# EAGLE board Generic_Business_Card (EAGLE 6.6.0)
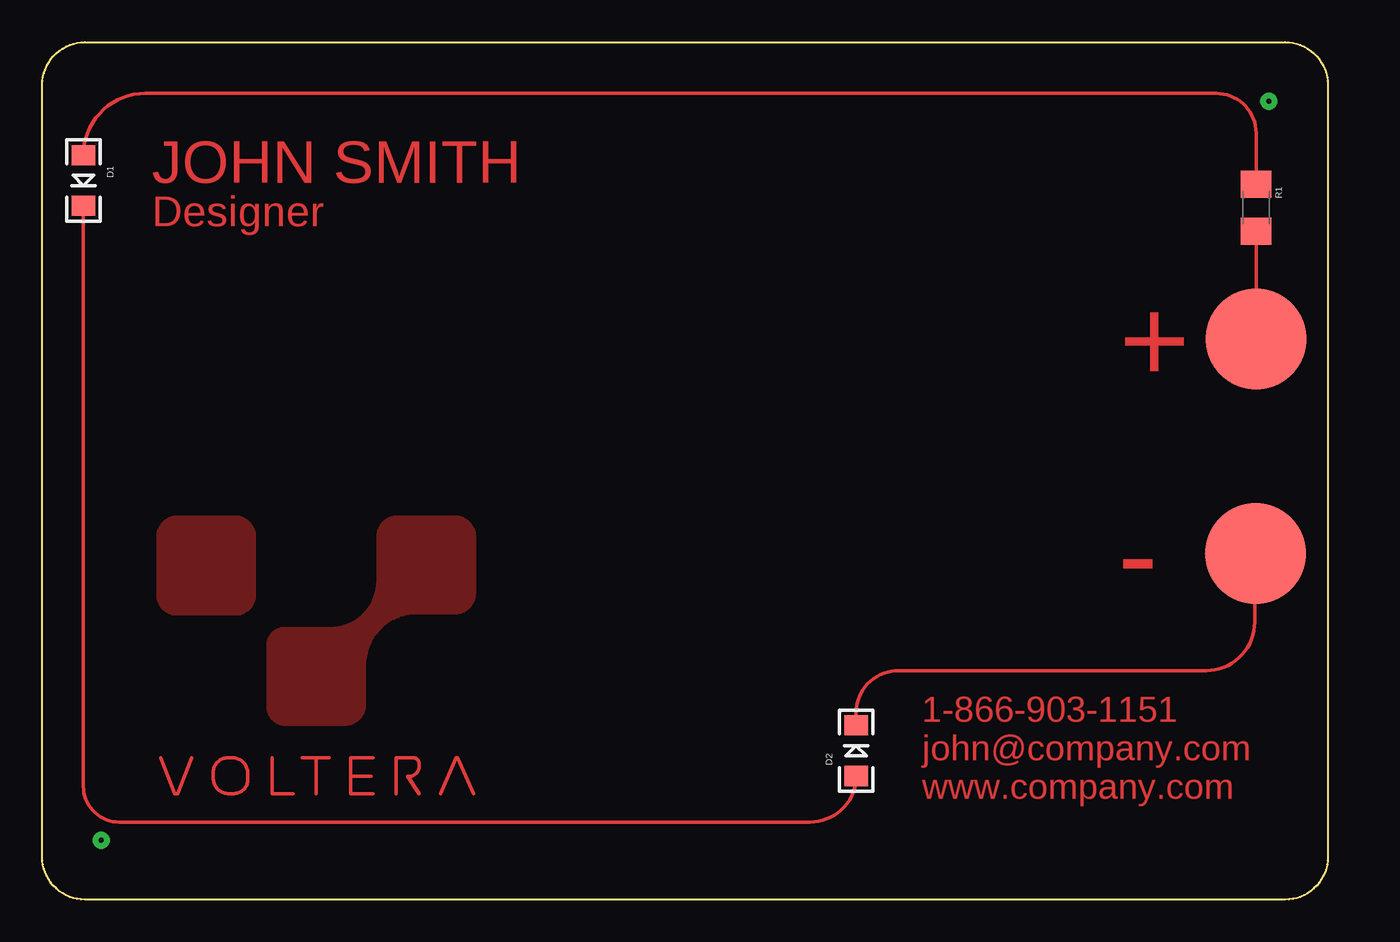
[diagram p0: board, top side]

Size 76.2 x 50.8 mm. Coordinates in mm from the lower left corner, seen from the top.
Copper layers (1*16): Top 0.035mm / dielectric 1.5mm / Bottom 0.035mm
Design rules "default": minimum track width 10mil, minimum drill 24mil, track to track 8mil, track to pad 8mil, pad to pad 8mil, via to via 8mil, smd to smd 8mil, copper to edge 40mil, drill to drill 8mil, minimum pad ring 10mil, minimum via ring 8mil, stop-mask expansion 4mil, vias tented up to drill 0mil, thermal gap 10mil

## Footprints (pad centres in the part's own frame; a part is rotated, then mirrored left to right if it is on the bottom)
LED-1206 = smd 1.2 x 1.4: A -1.5,0; C 1.5,0
1206 = smd 1.6 x 1.8: 1 -1.4,0; 2 1.4,0
2X3_BOARD = drill 0.3 pad 1: P$1 -33.4,-21.49; P$2 35.8,22.3
SMD_BATTERY_PADS = smd 6 x 6: NEG 6.35,-0.04; POS -6.35,0

## Placement (x,y rotation side)
D1  WHITE  [LED-1206]  2.44,42.61 270 top
D2  WHITE  [LED-1206]  48.24,8.83 90 top
R1  [1206]  71.94,41 270 top
U$1  2X3_BOARD  [2X3_BOARD]  36.9,25 0 top
U$8  SMD_BATTERY_9V  [SMD_BATTERY_PADS]  71.94,26.86 270 top

## Library data of the parts
D1 D2 = SparkFun-LED; PROD_ID: DIO-09955
R1 = SparkFun-Resistors
U$1 = Voltera_Community_Lib
U$8 = voltera

## Nets
N$24: D1.A R1.1
N$25: D1.C D2.A
N$27: R1.2 U$8.POS
N$28: D2.C U$8.NEG

## Tracks (layer width: path | path; a pad name or v marks a point on that pad's centre or on a via)
N$8
  pour Top: 6.93,21.53 arc-90 8.03,22.63 11.41,22.63 arc-90 12.51,21.53 12.51,18.06 arc-90 11.41,16.95 8.03,16.95 arc-90 6.93,18.06
N$9
  pour Top: 13.45,15.09 arc-90 14.38,16.02 17.09,16.02 arc90 19.96,18.9 19.96,21.53 arc-90 21.07,22.63 24.45,22.63 arc-90 25.55,21.53 25.55,18.14 arc-90 24.45,17.04 22.25,17.04 arc90 19.03,13.91 19.03,11.54 arc-90 17.93,10.44 14.46,10.44 arc-90 13.45,11.37
N$10
  Top 0.203: 7.01,8.4 7.86,6.29
N$11
  Top 0.203: 13.62,8.4 13.62,6.29 14.88,6.29
N$12
  Top 0.203: 15.39,8.4 16.24,8.4 | 16.24,8.4 17,8.4 | 16.24,8.4 16.24,6.29
N$13
  Top 0.203: 19.63,8.4 18.27,8.4 18.27,6.29 19.63,6.29
N$14
  Top 0.203: 18.27,7.32 19.49,7.32
N$15
  Top 0.203: 20.98,6.29 20.98,8.4 22,8.4 arc-90 22.34,8.07 22.34,7.9 arc-90 21.74,7.3
N$16
  Top 0.203: 24.62,8.4 25.55,6.29
N$17
  Top 0.203: 10.14,7.56 arc-90 10.99,8.4 11.25,8.4 arc-90 12.18,7.56 12.18,7.05 arc-90 11.33,6.29 10.99,6.29 arc-90 10.14,7.22 10.14,7.56
N$18
  Top 0.203: 8.03,6.29 8.87,8.4
N$19
  Top 0.203: 7.86,6.29 8.03,6.29
N$20
  Top 0.203: 23.61,6.29 24.54,8.4
N$21
  Top 0.203: 24.54,8.4 24.62,8.4
N$22
  Top 0.203: 21.74,7.3 21.66,7.3
N$23
  Top 0.203: 21.66,7.3 22.34,6.29
N$24
  Top 0.203: D1.A arc-90 6.11,47.77 69.57,47.77 arc-90 71.94,45.4 R1.1
N$25
  Top 0.203: D1.C 2.44,6.71 arc90 4.56,4.6 45.51,4.6 arc90 D2.A
N$27
  Top 0.203: U$8.POS R1.2 | R1.2 arc90 R1.2
N$28
  Top 0.203: D2.C 48.24,11.11 arc-90 50.78,13.57 68.98,13.57 arc90 71.86,16.45 71.86,20.46 arc-90 U$8.NEG

## Text on the board
Top: JOHN SMITH | Designer | + | - | 1-866-903-1151 / john@company.com / www.company.com